# EAGLE board PocketPowerSource4.4 (EAGLE 6.4)
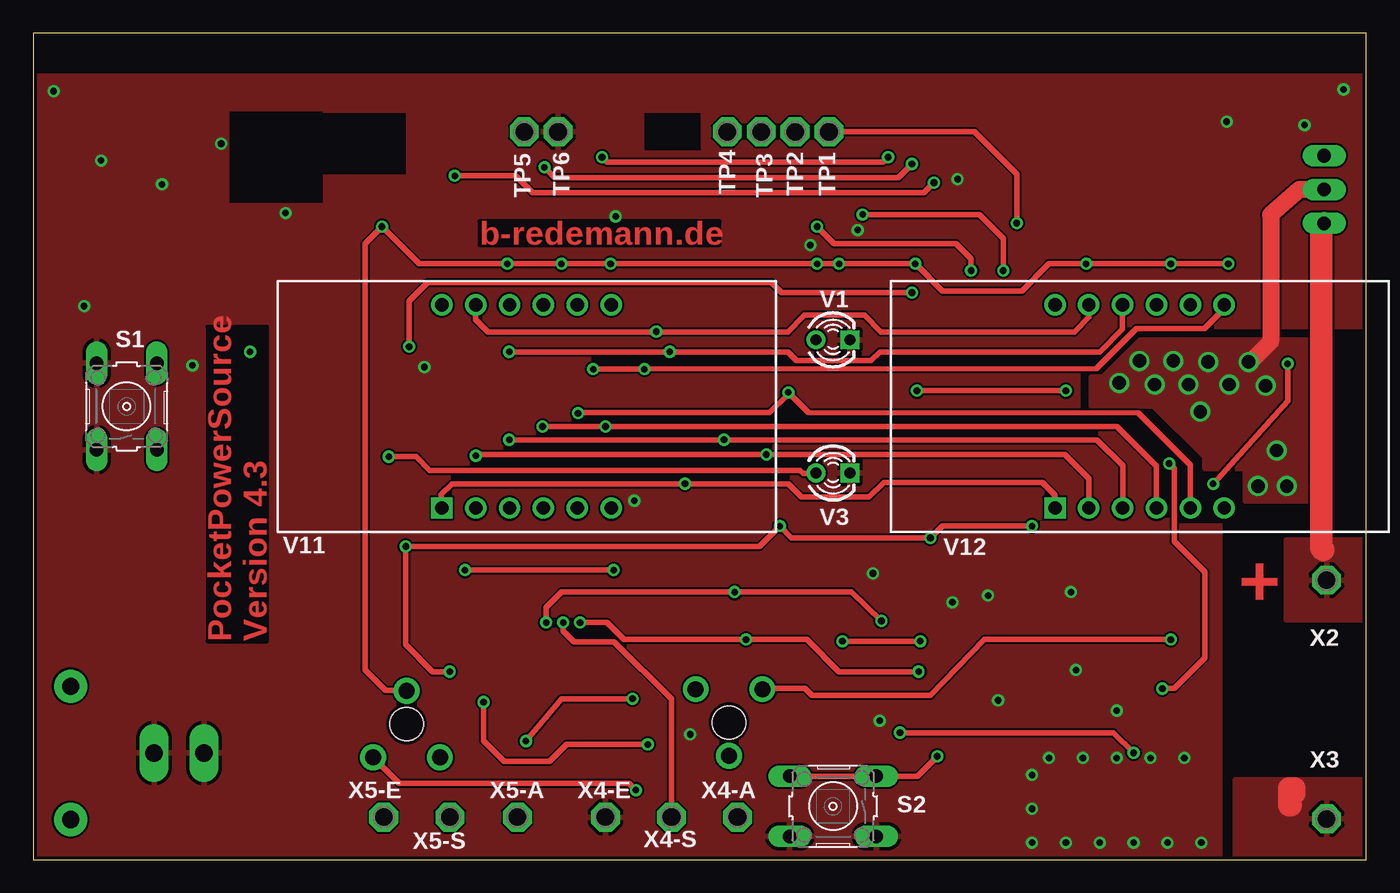
[diagram p0: board, top side]
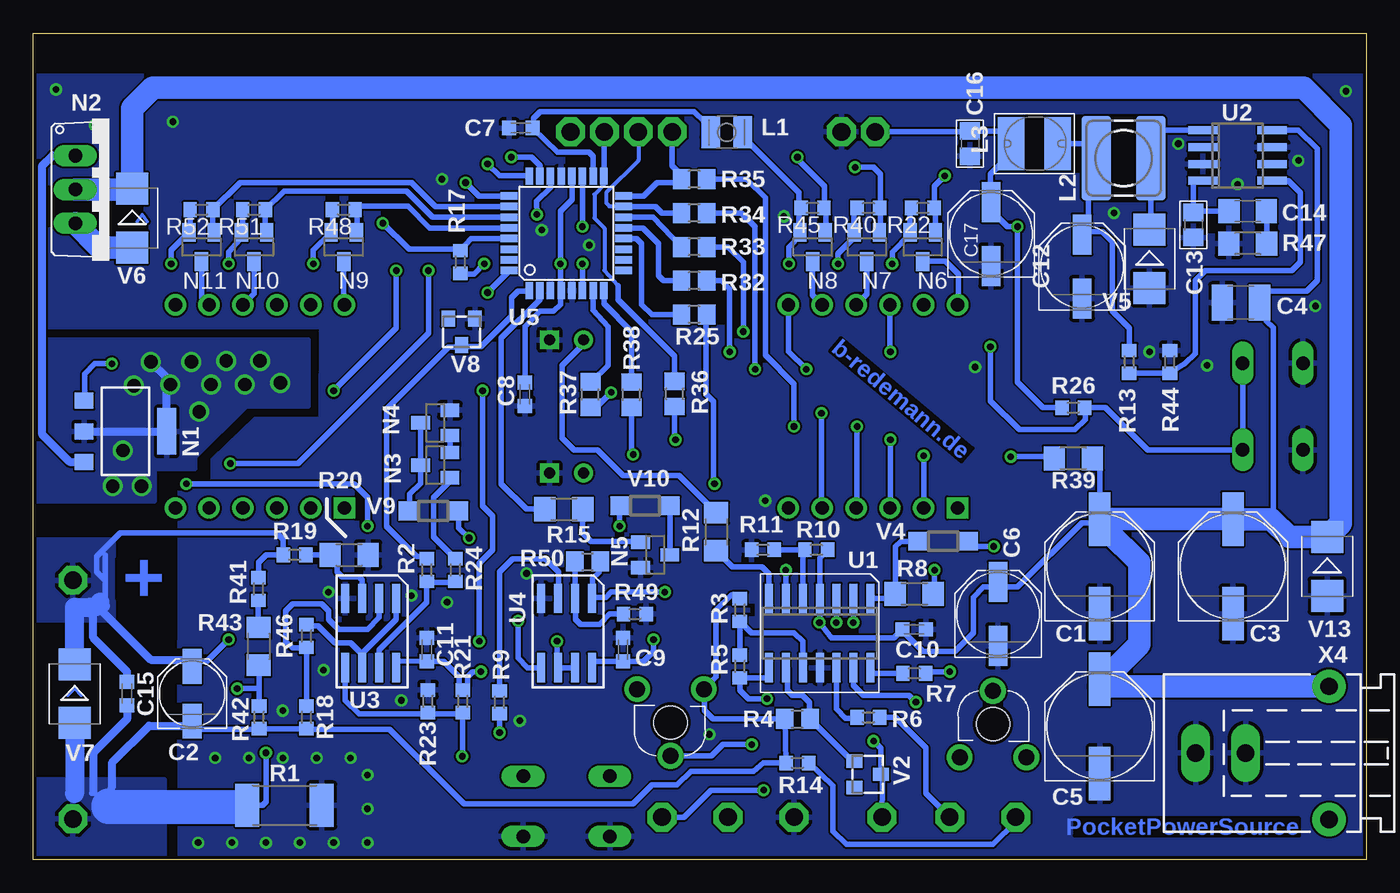
[diagram p1: board, bottom side, seen from below]

Size 100 x 62 mm. Coordinates in mm from the lower left corner, seen from the top.
Outline: 0,0 100,0 100,62 0,62 0,0
Copper layers (1*16): Top 0.035mm / dielectric 1.5mm / Bottom 0.035mm
Design rules "DFRobot_Eagle_Rule_v0.4": minimum track width 6mil, minimum drill 12mil, track to track 6mil, track to pad 6mil, pad to pad 6mil, via to via 6mil, smd to smd 0mil, copper to edge 10mil, drill to drill 10mil, minimum pad ring 12mil, minimum via ring 8mil, stop-mask expansion 2mil, vias tented up to drill 25mil, thermal gap 10mil
tKeepout: area 0,59 to 99.9,62
bKeepout: area 0,59 to 99.9,62
tRestrict: area 0,59 to 100.2,62; area 14.7,49.3 to 21.7,56.1; area 21.7,51.4 to 27.9,56; area 45.8,53.2 to 50,56; area 86,25.3 to 89.2,25.4
bRestrict: area 0,59 to 100.2,62; area 17.3,49.3 to 19.1,55.9; area 61,41.5 to 61.5,42.1; area 6.7,53.8 to 7.5,54.2; area 6.5,52.6 to 7.5,53.2; area 48.1,40.1 to 48.6,42.4; area 58.8,52.1 to 60.1,52.7; area 60.7,42.4 to 60.9,43.1; area 61.5,42.5 to 61.6,42.9; area 60,50.9 to 60.1,51.6; area 60.7,50.9 to 60.8,51.6; area 45.9,18.3 to 46.2,19.2; 6 more areas

## Footprints (pad centres in the part's own frame; a part is rotated, then mirrored left to right if it is on the bottom)
PANASONIC_F = smd 4 x 1.6: + 3.55,0; - -3.55,0
PANASONIC_C = smd 2.6 x 1.4: + 2.05,0; - -2.05,0
C1210 = smd 1.6 x 2.7: 1 -1.4,0; 2 1.4,0
PANASONIC_D = smd 3 x 1.4: + 2.4,0; - -2.4,0
C0603K = smd 1.05 x 1.08: 1 -0.875,0; 2 0.875,0
C0805 = smd 1.3 x 1.5: 1 -0.95,0; 2 0.95,0
C1206 = smd 1.6 x 1.8: 1 -1.4,0; 2 1.4,0
L2825P = smd 1.4 x 2.4: 1 -1.2,0; 2 1.2,0
POWER-CHOKE_WE-TPC = smd 6.3 x 2.2: 1 0,2.05; 2 0,-2.05
L4540 = smd 2 x 4: P$1 -1.75,0; P$2 1.75,0
PG-SOT-223 = smd 1.2 x 1.4: 1 -2.311,-3.099; 2 0,-3.099; 3 2.311,-3.099 | smd 3.5 x 1.4: 4 0,3.099
TO220AV = drill 1.016 long: B -2.54,-2.54; C 0,-2.54; E 2.54,-2.54
SOT23 = smd 1 x 1.4: 1 -0.95,-1.1; 2 0.95,-1.1; 3 0,1.1
PT6 = drill 1.2 pad 1.93: LEFT -2.5,-2.5; RIGHT 2.5,-2.5; WIPER 0,2.5 | hole 2.5: 0,0
R2512 = smd 1.8 x 3.2: 1 -2.8,0; 2 2.8,0
R0603 = smd 1 x 1.1: 1 -0.85,0; 2 0.85,0
R0805 = smd 1.3 x 1.5: 1 -0.95,0; 2 0.95,0
R1206 = smd 1.6 x 1.803: 1 -1.422,0; 2 1.422,0
B3F-10XX = drill 1.016 long: 1 -3.251,2.261; 2 3.251,2.261; 3 -3.251,-2.261; 4 3.251,-2.261
P1-13 = drill 1.321 pad 2.159 octagon: TP 0,0
SO14 = smd 0.6 x 2.2: 1 -3.81,-2.6; 2 -2.54,-2.6; 3 -1.27,-2.6; 4 0,-2.6; 5 1.27,-2.6; 6 2.54,-2.6; 7 3.81,-2.6; 8 3.81,2.6; 9 2.54,2.6; 10 1.27,2.6; 11 0,2.6; 12 -1.27,2.6; 13 -2.54,2.6; 14 -3.81,2.6
SO08 = smd 0.6 x 2.2: 1 -1.905,-2.6; 2 -0.635,-2.6; 3 0.635,-2.6; 4 1.905,-2.6; 5 1.905,2.6; 6 0.635,2.6; 7 -0.635,2.6; 8 -1.905,2.6
TQFP32-08 = smd 1.27 x 0.559: 1 -4.293,2.8; 2 -4.293,2; 3 -4.293,1.2; 4 -4.293,0.4; 5 -4.293,-0.4; 6 -4.293,-1.2; 7 -4.293,-2; 8 -4.293,-2.8; 17 4.293,-2.8; 18 4.293,-2; 19 4.293,-1.2; 20 4.293,-0.4; 21 4.293,0.4; 22 4.293,1.2; 23 4.293,2; 24 4.293,2.8 | smd 0.559 x 1.27: 9 -2.8,-4.293; 10 -2,-4.293; 11 -1.2,-4.293; 12 -0.4,-4.293; 13 0.4,-4.293; 14 1.2,-4.293; 15 2,-4.293; 16 2.8,-4.293; 25 2.8,4.293; 26 2,4.293; 27 1.2,4.293; 28 0.4,4.293; 29 -0.4,4.293; 30 -1.2,4.293; 31 -2,4.293; 32 -2.8,4.293
LED3MM = drill 0.813 pad 1.422: A -1.27,0 | drill 0.813 pad 1.422 square: K 1.27,0
TO236 = smd 1 x 1.2: A -1,-1; C 0,1; NC 1,-1
SOD123 = smd 1.4 x 1.4: A 1.9,0; C -1.9,0
SMB = smd 2.4 x 2.4: A 2.2,0; C -2.2,0
BX56-12 = drill 1 pad 1.6 square: 1 -6.35,-7.62 | drill 1 pad 1.6: 2 -3.81,-7.62; 3 -1.27,-7.62; 4 1.27,-7.62; 5 3.81,-7.62; 6 6.35,-7.62; 7 6.35,7.62; 8 3.81,7.62; 9 1.27,7.62; 10 -1.27,7.62; 11 -3.81,7.62; 12 -6.35,7.62
737992-5 = drill 1.3 pad 2.184 long: + 0,10; K 0,6.25 | drill 1.3 pad 2.5: -1 5,0; -2 -5,0

## Placement (x,y rotation side)
C1  100µ/50V  [PANASONIC_F]  20,22 90 bottom
C2  22µ/35V  [PANASONIC_C]  88.08,12.44 90 bottom
C3  100µ/50V  [PANASONIC_F]  10,22 90 bottom
C4  10µ  [C1210]  9.4,41.78 180 bottom
C5  100µ/50V  [PANASONIC_F]  20,10 90 bottom
C6  10µ/50V  [PANASONIC_D]  27.62,18.44 90 bottom
C7  100n  [C0603K]  63.43,54.89 180 bottom
C8  100n  [C0603K]  63.12,34.92 270 bottom
C9  100n  [C0603K]  55.75,15.75 90 bottom
C10  100n  [C0603K]  33.91,17.27 0 bottom
C11  100n  [C0603K]  70.48,15.75 90 bottom
C12  220µ/6V3  [PANASONIC_D]  21.32,44.49 90 bottom
C13  22p  [C0805]  12.95,47.62 90 bottom
C14  22n  [C1206]  8.89,48.64 0 bottom
C15  100n  [C0603K]  92.96,12.44 270 bottom
C16  22p  [C0805]  29.72,53.72 90 bottom
C17  220µ/6V3  [PANASONIC_D]  28.14,46.95 90 bottom
L1  10µH  [L2825P]  47.98,54.57 180 bottom
L2  33µH  [POWER-CHOKE_WE-TPC]  18.19,52.63 270 bottom
L3  10µH  [L4540]  24.89,53.72 180 bottom
N1  BCP56-16  [PG-SOT-223]  93.09,32.13 270 bottom
N2  MJE3055  [TO220AV]  94.31,50.28 270 bottom
N3  BC847  [SOT23]  69.85,29.59 90 bottom
N4  BC847  [SOT23]  69.85,32.77 90 bottom
N5  BC847  [SOT23]  53.34,22.86 270 bottom
N6  BSS84  [SOT23]  33.27,45.97 180 bottom
N7  BSS84  [SOT23]  37.47,45.97 180 bottom
N8  BSS84  [SOT23]  41.53,45.97 180 bottom
N9  BSS84  [SOT23]  76.71,45.97 180 bottom
N10  BSS84  [SOT23]  83.44,45.97 180 bottom
N11  BSS84  [SOT23]  87.38,45.97 180 bottom
P3  2k5  [PT6]  52.2,10.29 180 bottom
P4  10k  [PT6]  28,10.16 0 bottom
R1  0,1R 2W 1%  [R2512]  81.15,4.06 0 bottom
R2  10k  [R0603]  70.48,21.72 270 bottom
R3  8k2  [R0603]  46.99,18.72 270 bottom
R4  2k2  [R0805]  42.67,10.54 0 bottom
R5  10k  [R0603]  46.99,14.48 90 bottom
R6  10k  [R0603]  37.34,10.67 180 bottom
R7  1k  [R0603]  33.91,13.97 180 bottom
R8  18k  [R1206]  33.91,19.94 180 bottom
R9  1k  [R0603]  65.02,11.81 90 bottom
R10  22k  [R0603]  41.25,23.24 0 bottom
R11  47k  [R0603]  45.26,23.24 0 bottom
R12  4k7  [R1206]  48.77,24.6 90 bottom
R13  5k6  [R0603]  17.78,37.34 90 bottom
R14  100R  [R0603]  42.67,7.24 180 bottom
R15  4k7  [R1206]  60.2,26.29 180 bottom
R17  10k  [R0603]  67.97,44.84 90 bottom
R18  1k  [R0603]  79.5,10.67 90 bottom
R19  10k  [R0603]  80.39,22.86 0 bottom
R20  4k7  [R1206]  76.31,22.86 180 bottom
R21  10k  [R0603]  67.78,11.87 90 bottom
R22  1k  [R0603]  33.27,48.9 180 bottom
R23  10k  [R0603]  70.39,11.87 270 bottom
R24  10k  [R0603]  68.33,21.72 90 bottom
R25  470R  [R0805]  50.42,40.89 180 bottom
R26  10k  [R0603]  21.97,33.91 180 bottom
R32  470R  [R0805]  50.42,43.43 180 bottom
R33  470R  [R0805]  50.42,45.97 180 bottom
R34  470R  [R0805]  50.42,48.51 180 bottom
R35  470R  [R0805]  50.42,51.05 180 bottom
R36  470R  [R0805]  51.88,34.94 90 bottom
R37  470R  [R0805]  58.21,34.89 90 bottom
R38  470R  [R0805]  55.13,34.88 90 bottom
R39  4k7  [R1206]  21.97,30.1 0 bottom
R40  1k  [R0603]  37.34,48.9 180 bottom
R41  22k  [R0603]  83.1,20.3 90 bottom
R42  3k3  [R0603]  83.06,10.67 270 bottom
R43  4k7  [R1206]  83.1,16 90 bottom
R44  3k3  [R0603]  14.73,37.34 270 bottom
R45  1k  [R0603]  41.53,48.9 180 bottom
R46  1M*  [R0603]  79.5,16.76 90 bottom
R47  4k7  [R1206]  8.89,46.23 0 bottom
R48  1k  [R0603]  76.71,48.77 180 bottom
R49  10k  [R0603]  54.86,18.41 180 bottom
R50  91k  [R0805]  58.42,22.35 0 bottom
R51  1k  [R0603]  83.44,48.77 180 bottom
R52  1k  [R0603]  87.38,48.77 180 bottom
S1  on/off  [B3F-10XX]  7,34 90 top
S2  Set-I  [B3F-10XX]  60,4 180 top
TP1  RESET  [P1-13]  59.69,54.61 0 top
TP2  SCK  [P1-13]  57.15,54.61 0 top
TP3  MOSI  [P1-13]  54.61,54.61 0 top
TP4  MISO  [P1-13]  52.07,54.61 0 top
TP5  +3V3  [P1-13]  36.83,54.61 0 top
TP6  GND  [P1-13]  39.37,54.61 0 top
U1  LM324D  [SO14]  41,17 180 bottom
U2  L5970D  [SO08]  9.65,52.83 270 bottom
U3  LM358D  [SO08]  74.7,17 180 bottom
U4  LM358D  [SO08]  60,17 180 bottom
U5  Atmega8A-AU  [TQFP32-08]  60,47 90 bottom
V1  CC / rot  [LED3MM]  60,39 0 top
V2  BZX84C5V1  [TO236]  37.4,6.4 270 bottom
V3  PWR / gn  [LED3MM]  60,29 0 top
V4  SS0540  [SOD123]  31.75,23.88 0 bottom
V5  SS24  [SMB]  16.26,45.09 270 bottom
V6  ES2D  [SMB]  92.58,48.13 270 bottom
V7  ES2D  [SMB]  96.9,12.44 270 bottom
V8  BZX84C3V3  [TO236]  67.87,39.6 180 bottom
V9  SS0540  [SOD123]  69.98,26.16 0 bottom
V10  SS0540  [SOD123]  54.1,26.54 180 bottom
V11  BA56-12EWA  [BX56-12]  37,34 0 top
V12  BA56-12EWA  [BX56-12]  83,34 0 top
V13  ES2D  [SMB]  2.92,22 270 bottom
X2  DC_OUT  [P1-13]  97.03,20.95 0 top
X3  GND_OUT  [P1-13]  97.03,3.05 0 top
X4  PWR  [737992-5]  2.8,8 90 bottom
X4-A  P_I-A  [P1-13]  52.83,3.17 90 top
X4-E  P_I-E  [P1-13]  42.93,3.17 90 top
X4-S  P_I-W  [P1-13]  47.88,3.17 90 top
X5-A  P_U-A  [P1-13]  36.32,3.17 90 top
X5-E  P_U-E  [P1-13]  26.29,3.17 0 top
X5-S  P_U-S  [P1-13]  31.24,3.17 0 top

## Library data of the parts
C1-C17 L2 L3 R1-R15 R17-R26 R32-R52 = rcl
L1 = resistor
N1 = infineon
N2 = transistor-power
N3-N5 = transistor-neu-to92
N6-N11 = transistor-small-signal
P3 P4 = piher
S1 S2 = switch-omron; MPN: B3F-1000; OC_FARNELL: 176432; OC_NEWARK: 36M3542
TP1-TP6 X2 X3 X4-A X4-E X4-S X5-A X5-E X5-S = testpad
U1 U3 U4 = linear; MF: STMicroelectronics
U2 = st-microelectronics; MF: STMicroelectronics
U5 = atmel; MPN: ATMEGA8-16AU; OC_FARNELL: 9171371; OC_NEWARK: 73M8863
V1 V3 = led
V2 V4 V5 V8-V10 = diode
V6 V7 V13 = diode; OC_REICHELT: ES 2D SMD
V11 V12 = display-kingbright; OC_FARNELL: unknown; OC_NEWARK: unknown
X4 = con-conrad

## Nets
+3V3: C8.1 C16.2 C17.+ L1.1 L3.P$2 N6.2 N7.2 N8.2 N9.2 N10.2 N11.2 P4.WIPER R17.1 R22.2 R26.2 R40.2 R45.2 R48.2 R51.2 R52.2 TP5.TP U5.4 U5.6 U5.20
A: R33.1 V11.11 V12.11
ADC6: R42.1 R43.1 U5.19
ADC7: U4.6 U4.7 U5.22
AVCC: C7.1 L1.2 U5.18
B: R34.1 V11.7 V12.7
C: R35.1 V11.4 V12.4
CTRL_ON_OFF: N5.3 V10.C
D: R38.1 V11.2 V12.2
DC_OUT: C2.+ C15.1 N2.E P3.RIGHT R19.1 R41.2 V6.A V7.C X2.TP
DP: R36.1 V11.3 V12.3
E: R25.1 V11.1 V12.1
F: R32.1 V11.10 V12.10
G: R37.1 V11.5 V12.5
GND: C1.- C3.- C4.2 C5.- C6.- C7.2 C8.2 C9.2 C10.2 C11.2 C12.- C13.1 C16.1 C17.- N4.2 N5.2 R1.2 R11.1 R20.1 R23.1 R44.1 R47.1 R49.1 S1.1 S1.2 S2.1 S2.2 TP6.TP U1.11 U2.3 U2.7 U3.4 U4.4 U5.3 U5.5 U5.21 V1.K V3.K V5.A V8.A V13.A X4-E.TP X4.+ X4.K
GND_OUT: C2.- C15.2 P3.LEFT R1.1 R3.1 R4.1 R9.1 R14.2 R18.1 R42.2 V7.A X3.TP
MISO: R35.2 TP4.TP U5.16
MOSI: R34.2 TP3.TP U5.15
N$1: R19.2 R20.2 U3.3
N$2: R8.1 U1.6
N$3: R5.1 U1.8 V2.C X5-A.TP
N$4: R12.1 U1.7
N$5: R9.2 U4.3
N$6: P4.RIGHT X4-A.TP
N$7: R12.2 V1.A
N$8: R8.2 U1.1 V4.C
N$9: N3.1 R24.2
N$10: R3.2 R5.2 U1.10
N$11: R4.2 U1.9 V2.A
N$12: N1.3 N2.B
N$13: R2.2 R24.1 U3.7
N$14: R7.2 U1.14
N$15: R41.1 R43.2
N$17: C13.2 C14.1 U2.4
N$18: R10.1 R11.2 U1.5
N$19: R6.2 U1.12
N$20: P3.WIPER U1.13
N$21: R6.1 X5-S.TP
N$22: N5.1 R15.1
N$23: R14.1 X5-E.TP
N$24: U1.3 X4-S.TP
N$25: C12.+ L2.2 L3.P$1 R13.2
N$27: R18.2 R46.1 U3.2
N$28: R46.2 U3.1 U3.6
N$29: R21.1 R23.2 S2.3 S2.4 U3.5
N$30: R49.2 R50.1 U4.2
N$31: N3.2 N4.1
N$34: N3.3 N4.3 V9.C
N$35: R39.1 V3.A
N$36: R25.2 U5.12
N$37: R32.2 U5.13
N$45: N7.3 V11.9
N$46: N10.3 V12.9
N$47: N8.3 V11.8
N$48: N6.3 V11.12
N$49: N9.3 V12.12
N$50: N11.3 V12.8
N$53: R33.2 U5.14
N$57: R37.2 U5.7
N$58: R38.2 U5.8
N$59: R13.1 R44.2 U2.5
N$60: C14.2 R47.2
N$61: L2.1 U2.1 V5.C
ON/OFF: R26.1 S1.3 S1.4 U5.32
ON_OFF: N1.1 R7.1 V4.A V9.A V10.A
ON_OFF_T: R15.2 U5.2
PC0: N8.1 R45.1 U5.23
PC1: N7.1 R40.1 U5.24
PC2: N6.1 R22.1 U5.25
PC3: N11.1 R52.1 U5.26
PC4: N10.1 R51.1 U5.27
PC5: N9.1 R48.1 U5.28
RESET: R17.2 TP1.TP U5.29
SCK: R36.2 TP2.TP U5.17
SHT_DTCT: R2.1 U5.1 V8.C
VDC_IN: C1.+ C3.+ C4.1 C5.+ C6.+ C9.1 C10.1 C11.1 N1.2 N1.4 N2.C R10.2 R21.2 R39.2 U1.4 U2.8 U3.8 U4.8 V6.C V13.C X4.-1
X6-OPAMP: R50.2 U1.2 U4.1 U4.5

## Tracks (layer width: path | path; a pad name or v marks a point on that pad's centre or on a via)
+3V3  (via drill 0.5)
  Top 0.406: v89.66,44.7 v85.34,44.7 v78.99,44.7 78.99,44.58 78.87,44.7 76.2,44.7 74.17,42.67 68.2,42.67 v66.17,44.7 v60.45,44.7 v58.8,44.7 v43.31,44.7 v39.62,44.7 v35.56,44.7 28.96,44.7 v26.16,47.5 24.89,46.23 24.89,14.22 26.42,12.7 27.96,12.7 P4.WIPER
  Bottom 0.406: 42.55,49.06 42.55,47.14 N8.2 42.48,46.8 43.31,45.97 v43.31,44.7 | v39.62,44.7 39.62,45.47 38.41,46.67 N7.2 38.41,48.67 R40.2 | v78.99,44.7 78.99,45.72 77.66,47.06 N9.2 77.56,47.17 R48.2 | v85.34,44.7 85.34,45.59 84.26,46.8 84.39,46.93 N10.2 84.29,47.17 R51.2 | v89.66,44.7 89.66,45.72 88.33,47.06 N11.2 88.3,47.1 88.23,47.1 R52.2 | 60.4,44.65 v60.45,44.7 | 58.8,44.58 v58.8,44.7 U5.6 | U5.20 59.56,51.26 59.56,49.53 60.45,48.64 v60.45,44.7 | v60.45,44.7 60.45,42.76 U5.4 60.45,42.63 60.45,41.66 60.96,41.15 61.98,41.15 63.12,40.01 C8.1 | 46.61,54.48 46.69,54.48 L1.1 46.86,54.48 46.86,53.85 46.7,53.68 46.19,53.68 42.55,50.04 42.55,49.06 | L3.P$2 26.1,53.72 | TP5.TP 29.59,54.61 C16.2 26.64,54.67 L3.P$2 | v26.16,47.5 26.15,47.5 | L3.P$2 26.09,52.83 26.8,52.83 28.19,51.44 28.19,49.4 C17.+ 28.14,48.72 26.92,47.5 v26.16,47.5 | v66.17,44.7 66.93,43.94 67.93,43.94 R17.1 | R26.2 24.26,33.91 26.16,35.81 v26.16,47.5 | v35.56,44.7 35.56,45.59 34.22,46.93 N6.2 34.22,48.8 R22.2 | 42.55,49.06 R45.2
A  (via drill 0.5)
  Top 0.406: V11.11 33.19,40.51 34.1,39.6 46.63,39.6 | V12.11 79.2,40.7 78.1,39.6 63.6,39.6 62.35,40.85 57.85,40.85 56.6,39.6 46.63,39.6 | 46.63,39.6 v46.74,39.62
  Bottom 0.406: R33.1 47.88,45.97 46.74,44.83 v46.74,39.62
ADC6  (via drill 0.5)
  Top 0.406: v70.36,44.2 70.36,45.09 69.22,46.23 60.07,46.23 v58.8,47.5 | v85.22,29.72 85.6,29.34 85.6,23.88 87.88,21.59 87.88,15.11 85.6,12.83 v84.71,12.83
  Bottom 0.406: 83.06,12.83 R42.1 | v70.36,44.2 70.36,39.5 80.14,29.72 v85.22,29.72 | v58.8,47.5 U5.19 | v84.71,12.83 83.06,12.83 | 83.06,12.83 83.06,14.56 R43.1
ADC7  (via drill 0.5)
  Top 0.406: v62.22,48.4 70.98,48.4 72.77,46.61 v72.77,44.2 | v77.47,35.18 v66.29,35.18 | v60.71,16.38 v66.55,16.38
  Bottom 0.406: U5.22 61.2,50.43 62.23,49.4 v62.22,48.4 | v72.77,44.2 72.77,39.88 v77.47,35.18 | v66.55,16.38 66.55,22.23 65.53,23.24 65.53,25.78 66.29,26.54 v66.29,35.18 | U4.7 U4.6 60.71,14.4 v60.71,16.38
AVCC
  Bottom 0.406: U5.18 58,52.79 58.29,53.09 60.67,53.09 C7.1 62.48,54.9 62.48,55.63 61.98,56.13 50.42,56.13 49.66,55.37 49.66,54.23 49.68,54.2 L1.2
B  (via drill 0.5)
  Top 0.406: v42,36.8 v45.85,36.8 79.76,36.83 82.77,39.85 87.87,39.85 89.37,41.35 89.5,41.47 V12.7
  Bottom 0.406: V11.7 43.35,38.12 v42,36.8 | R34.1 46.86,48.51 45.85,47.5 v45.85,36.8
C  (via drill 0.5)
  Top 0.406: V12.4 84.27,29.53 81.3,32.5 v42.93,32.5 v38.2,32.5
  Bottom 0.406: v38.2,32.5 38.2,26.51 V11.4 | R35.1 46.48,51.05 45.09,49.66 45.09,37.85 42.93,35.69 v42.93,32.5
CTRL_ON_OFF
  Bottom 0.406: V10.C 52.24,26.5 N5.3
D  (via drill 0.5)
  Top 0.406: V12.2 79.19,28.61 77.4,30.4 v54.99,30.4 33.3,30.4 v33.2,30.3 33.27,30.37
  Bottom 0.406: v33.2,30.3 V11.2 | R38.1 55.13,30.54 v54.99,30.4
DC_OUT  (via drill 0.5)
  Top 0.406: v85.34,16.51 71.37,16.51 67.31,12.32 58.42,12.32 57.91,12.83 54.74,12.83 P3.RIGHT
  Top 1.676: 96.77,23.24 96.65,23.37 96.65,47.53 N2.E
  Bottom 0.406: 95.5,18.67 95.76,18.92 | 94.74,19.05 94.74,18.92 | 94.74,18.92 94.74,18.54 | C2.+ 88.23,14.99 88.11,14.86 87,14.86 v85.34,16.51 | 94.61,22.86 94.61,20.95 | 94.61,20.95 94.61,19.05 94.74,18.92 | 94.61,20.95 95.25,21.59 95.25,22.73 93.47,24.51 81.75,24.51 81.24,24 R19.1 82.54,22.86 83.1,22.3 R41.2
  Bottom 0.61: C15.1 92.96,14.1 95.5,16.64 95.5,18.67 | 94.74,18.54 91.19,14.99 88.23,14.99
  Bottom 1.016: 94.74,19.05 95,19.3
  Bottom 1.422: V7.C 96.9,18.92 95.76,18.92 95.38,18.92 95,19.3
  Bottom 1.676: V6.A 95.05,45.93 N2.E
  pour Top: 100,24 94,24 94,18 100,18
  pour Bottom: 100,24 94,24 94,18 100,18
DP  (via drill 0.5)
  Top 0.406: V12.3 81.73,29.57 79.8,31.5 v51.82,31.5 v35.7,31.5
  Bottom 0.406: v35.7,31.5 35.7,26.55 V11.3 | 51.94,34.04 51.88,33.98 R36.1 51.88,31.56 v51.82,31.5
E  (via drill 0.5)
  Top 0.406: V12.1 76.65,27.35 75.7,28.3 63.81,28.3 62.7,27.19 57.65,27.19 56.64,28.2 v48.9,28.2 31.4,28.2 30.6,27.4 30.6,26.43 V11.1
  Bottom 0.406: v48.9,28.2 48.9,28.32 48.96,28.25 48.96,34.36 49.53,34.92 49.53,40.83 R25.1
F  (via drill 0.5)
  Top 0.406: v35.7,38.1 v47.75,38.1 56.6,38.1 57.25,37.45 62.85,37.45 63.5,38.1 80,38.1 81.7,39.8 81.7,41.59 V12.10
  Bottom 0.406: V11.10 35.73,38.17 v35.7,38.1 | R32.1 48.39,43.43 47.75,42.8 v47.75,38.1
G  (via drill 0.5)
  Top 0.406: V12.5 86.81,29.59 82.9,33.5 58.17,33.53 56.8,34.9 56.77,34.9 | 56.77,34.9 56.61,34.9 55.24,33.53 40.87,33.53 v40.87,33.5 40.9,33.6 | v56.64,35.05 56.77,34.9
  Bottom 0.406: v40.87,33.5 40.87,26.57 V11.5 | R37.1 57.99,33.91 57.78,33.91 v56.64,35.05
GND  (via drill 0.5)
  other vias: 29.34,36.96 81.28,11.18 78.23,14.22 87.63,1.27 45.09,26.92 43.69,48.26 72.39,11.94 98.3,57.78 95.38,55.12 89.53,55.37 69.34,51.05 77.85,20.07 1.52,57.66 61.85,47.24 58.29,46.1 68.96,19.3 63.5,10.41 49.28,9.4 62.99,21.46 9.65,50.67 11.94,37.08 16.26,38.1 14.1,53.72 18.92,48.51 5.08,52.45 85.09,1.27 82.55,1.27 80.01,1.27 77.47,1.27 74.93,1.27 74.93,3.81 74.93,6.35 76.2,7.62 78.74,7.62 81.28,7.62 83.82,7.62 86.36,7.62 71.63,19.81 3.81,41.53
  pour Bottom: 0,62 99.97,62 100,40 78.38,40 78.4,33.02 83.32,33.05 86.51,30 86.51,28.13 89,28 88.98,25.11 89.03,7.87 88.98,6.86 88.98,0 0,0
  pour Top: 0,62 0,0 89,0 89,28 86.51,28 86.51,30 83.3,33.05 78.38,33.14 78.36,36.7 81.66,40 99.89,40 100,40.11 100,62
GND_OUT  (via drill 0.5)
  Top 0.406: v65.02,9.53 81.03,9.53 v82.55,8
  Top 1.676: 94.36,4.06 94.23,4.06 94.23,4.95 | 94.23,4.95 94.61,4.95 94.61,5.33 94.23,5.33 94.23,4.95
  Bottom 0.406: R18.1 R42.2 83.12,9.78 87.83,9.78 C2.- | R3.1 47.62,19.87 48.77,18.73 48.77,13.72 P3.LEFT 49.66,12.75 49.66,11.18 49.02,10.54 R4.1 R14.2 45.21,7.24 45.97,6.6 50.67,6.6 51.69,5.59 53.59,5.59 54.99,4.19 67.69,4.19 73.28,9.78 79.46,9.78 R18.1 | 95.5,5.08 95.63,4.95 | 94.11,5.46 94.23,5.33 | 79.38,9.72 R18.1 | R9.1 v65.02,9.53 | v82.55,8 82.55,4.32 82.8,4.06 R1.1
  Bottom 0.61: C15.2 92.96,10.54 95.5,8 95.5,5.08 | 94.11,5.46 94.11,7.24 91.31,10.04 88.43,10.04 C2.-
  Bottom 1.422: V7.A 96.9,4.95 | R1.1 84.33,4.06 84.33,3.94
  Bottom 2.54: 84.33,3.94 94.36,3.94 94.36,4.06
  pour Top: 100,0 90.19,0 90.19,6 100,6
  pour Bottom: 100,0 90.19,0 90.19,6 100,6
MISO
  Bottom 0.305: 51.62,50.8 R35.2
  Bottom 0.406: R35.2 51.37,51.37 52.07,52.07 TP4.TP | U5.16 54.21,49.8 53.21,50.8 51.62,50.8
MOSI
  Bottom 0.305: TP3.TP 54.61,52.45 57.02,50.04 57.02,49.28 56.77,49.02 55.73,49.02
  Bottom 0.406: 51.56,48.51 R34.2 52.83,48.51 53.32,49 U5.15 55.73,49.02
N$1
  Bottom 0.406: R19.2 R20.2 77.22,22.82 77.22,21.59 76.83,21.21 75.56,21.21 75.33,20.98 U3.3
N$2  (via drill 0.5)
  Top 0.406: v43.55,21.72 v32.38,21.72
  Bottom 0.406: v32.38,21.72 32.38,20.07 R8.1 | U1.6 v43.54,21.71 v43.55,21.72
N$3  (via drill 0.5)
  Top 0.406: v36.96,8.89 39.62,12.06 v44.96,12.06
  Bottom 0.406: U1.8 44.83,14.38 44.83,13.59 44.87,13.63 R5.1 46.99,12.7 46.35,12.06 v44.96,12.06 | X5-A.TP 36.3,5.7 36.3,6.4 V2.C 36.4,8.33 v36.96,8.89
N$4
  Bottom 0.406: U1.7 44.81,21.44 45.34,21.97 47.54,21.97 R12.1
N$5
  Bottom 0.406: U4.3 60.58,19.66 60.58,21.59 61.56,22.57 64.05,22.57 65.02,21.59 R9.2
N$6  (via drill 0.5)
  Top 0.406: v45.21,5.21 44.7,5.71 27.45,5.71 P4.RIGHT
  Bottom 0.406: v45.21,5.21 49.15,5.21 51.18,3.17 X4-A.TP
N$7
  Bottom 0.406: V1.A 58.73,38.68 60.33,37.08 60.33,31.62 59.44,30.73 57.66,30.73 55.75,28.83 51.56,28.83 48.77,26.04 R12.2
N$8
  Bottom 0.406: U1.1 35.67,19.6 R8.2 35.31,19.96 35.31,23.5 34.92,23.88 V4.C
N$9
  Bottom 0.406: N3.1 68.75,28.41 69.98,27.18 69.98,24.22 R24.2
N$10
  Bottom 0.406: U1.10 42.27,16.36 42.93,17.02 46.13,17.02 R3.2 R5.2
N$11
  Bottom 0.406: U1.9 43.43,14.29 43.43,12.7 43.05,12.32 42.29,12.32 41.78,11.81 41.78,10.6 R4.2 38.91,7.73 V2.A
N$12
  Bottom 0.61: N1.3 96.22,29.84 97.28,29.84 99.31,31.88 99.31,52.07 98.55,52.83 96.87,52.83 N2.B
N$13
  Bottom 0.406: U3.7 74.06,15.73 70.48,19.3 R2.2 70.16,20.8 68.65,20.8 R24.1
N$14
  Bottom 0.406: R7.2 37.19,13.97 U1.14
N$15
  Bottom 0.406: R43.2 83.12,17.91 83.12,19.42 R41.1
N$17
  Bottom 0.406: C14.1 12.95,48.64 C13.2 12.95,50.93 U2.4
N$18
  Bottom 0.406: R11.2 R10.1 42.27,23.07 U1.5
N$19
  Bottom 0.406: R6.2 38.35,10.61 39.05,10.61 39.75,11.3 39.75,14.38 U1.12
N$20  (via drill 0.5)
  Top 0.406: v46.1,8.64 40.01,8.64 38.73,7.37 35.31,7.37 33.78,8.89 v33.78,11.81
  Bottom 0.406: v33.78,11.81 34.29,12.32 37.72,12.32 38.46,13.06 U1.13 | P3.WIPER 49.11,7.79 48.26,8.64 v46.1,8.64
N$21
  Bottom 0.406: R6.1 35.31,10.67 33.02,8.38 33.02,4.95 X5-S.TP
N$22
  Bottom 0.406: N5.1 54.88,23.88 58.17,23.88 58.8,24.51 58.8,26.26 R15.1
N$23
  Bottom 0.406: R14.1 40,5.52 40,2.13 39,1.13 28,1.13 26.28,2.85 X5-E.TP 26.28,3.18
N$24  (via drill 0.5)
  Top 0.406: v39.75,17.78 39.75,17.14 40.56,16.33 43.59,16.33 47.87,12.05 47.87,3.18 X4-S.TP
  Bottom 0.406: U1.3 39.73,17.8 v39.75,17.78
N$25
  Bottom 0.406: L3.P$1 20.24,53.72 L2.2 20.24,52.58 20.83,52.58 20.83,47.09 C12.+ 20.8,47.12 19.81,47.12 19.05,46.35 19.05,41.15 17.78,39.88 R13.2
N$27
  Bottom 0.406: U3.2 74.04,19.37 74.04,18.16 74.93,17.27 77.09,17.27 77.85,18.03 77.85,18.67 78.36,19.18 80.55,19.18 81.05,18.67 81.05,16.38 80.55,15.88 79.56,15.88 R46.1 | 79.44,15.88 R46.1 | R18.2 R46.1
N$28
  Bottom 0.406: U3.6 75.33,15.39 | U3.1 72.77,19.32 72.77,18.03 75.33,15.47 75.33,15.39 | 75.33,15.39 76.2,16.26 77.34,16.26 78.61,17.53 79.38,17.53 R46.2
N$29  (via drill 0.5)
  Top 0.406: S2.4 S2.3 66.33,6.26 v67.82,7.75
  Bottom 0.406: U3.5 76.6,11.96 75.56,10.92 70.39,10.92 | 70.39,10.92 R23.2 | 70.39,10.92 67.79,10.92 | 67.79,10.92 R21.1 | 67.79,10.92 67.79,7.78 v67.82,7.75
N$30
  Bottom 0.406: R50.1 U4.2 59.31,19.54 59.31,18.03 58.93,17.65 57.53,17.65 56.77,18.41 R49.2
N$31
  Bottom 0.406: N4.1 N3.2
N$32
  Bottom 0.254: 91.44,47.88 91.82,48.39 92.2,47.88
N$33
  Bottom 0.254: 96.39,12.32 96.9,12.83 97.41,12.32
N$34
  Bottom 0.406: N4.3 N3.3 70.95,28.24 71.75,27.43 71.75,26.28 V9.C
N$35  (via drill 0.5)
  Top 0.406: V3.A 58.69,28.96 57.78,28.96 57.53,29.21 29.72,29.21 28.7,30.23 v26.67,30.23
  Bottom 0.406: v26.67,30.23 23.05,30.23 R39.1
N$36
  Bottom 0.406: U5.12 54.73,46.6 54.36,46.23 54.36,41.66 53.59,40.89 R25.2
N$37
  Bottom 0.406: U5.13 54.26,47.4 53.09,46.23 53.09,43.81 52.7,43.43 R32.2
N$45
  Bottom 0.406: V11.9 37.47,42.42 N7.3
N$46
  Bottom 0.406: V12.9 83.44,42.45 N10.3
N$47
  Bottom 0.406: V11.8 41.53,42.34 N8.3
N$48
  Bottom 0.406: V11.12 30.61,41.66 30.61,43.94 31.57,44.9 33.25,44.9 N6.3
N$49
  Bottom 0.406: V12.12 76.71,41.68 N9.3
N$50
  Bottom 0.406: V12.8 87.38,42.19 N11.3
N$53
  Bottom 0.406: U5.14 53.49,48.2 R33.2 51.31,45.97
N$57
  Bottom 0.406: U5.7 58,41.24 56.9,40.01 56.9,37.08 58.17,35.81 58.17,35.89 R37.2
N$58
  Bottom 0.406: U5.8 57.2,41.71 55.12,39.62 55.12,35.85 R38.2
N$59
  Bottom 0.406: U2.5 5.84,50.93 4.95,50.04 4.95,44.83 5.59,44.2 12.06,44.2 12.83,43.43 12.83,37.97 13.59,37.21 14.64,36.58 R44.2 | 14.93,36.58 R44.2 | 17.91,36.62 R13.1 R44.2
N$60
  Bottom 0.406: C14.2 7.47,48.64 R47.2
N$61
  Bottom 0.406: U2.1 16.14,54.74 | 16.26,54.74 16.14,54.74 | 16.14,54.74 L2.1 16.14,47.28 V5.C
ON/OFF  (via drill 0.5)
  Top 0.406: v65.91,42.55 56.13,42.55 55.37,43.31 29.59,43.31 28.19,41.91 v28.19,38.48
  Bottom 0.406: U5.32 64.29,44.16 v65.91,42.55 | v28.19,38.48 28.19,34.42 26.04,32.26 21.84,32.26 21.08,33.02 21.08,33.85 R26.1 | 20.95,33.84 R26.1 | S1.4 S1.3 9.28,30.73 16.38,30.73 19.56,33.91 R26.1
ON_OFF  (via drill 0.5)
  Top 0.406: v31.24,14.1 29.97,14.1 27.94,16.13 v27.94,23.5 54.48,23.5 v56.01,25.02 56.9,24.13 v67.31,24.13 68.2,25.02 v74.93,25.02 | v94.11,37.21 94.11,34.42 v88.52,28.19
  Bottom 0.406: v88.52,28.19 75.95,28.19 74.93,27.18 v74.93,25.02 | v94.11,37.21 95.38,37.21 96.14,36.45 96.14,34.49 N1.1 | V4.A 29.85,23.75 29.59,23.5 v27.94,23.5 | V9.A 68.08,24.9 v67.31,24.13 | v31.24,14.1 33.06,14.1 R7.1 | v56.01,25.02 V10.A
ON_OFF_T
  Bottom 0.406: U5.2 62,42.01 64.9,39.12 64.9,28.19 62.99,26.29 R15.2
PC0  (via drill 0.5)
  Top 0.406: v64.14,52.7 63.75,52.32 43.05,52.32 42.67,52.7 v42.66,52.7
  Bottom 0.406: v64.14,52.7 62.61,52.7 61.98,52.07 61.98,51.32 U5.23 | v42.66,52.7 42.66,52.57 40.64,50.55 40.64,48.93 R45.1 40.51,48.73 40.51,47.17 40.58,47.1 N8.1
PC1  (via drill 0.5)
  Top 0.406: v38.35,51.94 v38.35,51.95 39.12,51.18 64.9,51.18 v65.91,52.2
  Bottom 0.406: v65.91,52.2 65.02,51.31 62.81,51.31 U5.24 | v38.35,51.94 36.93,51.94 36.93,51.91 36.45,51.44 36.45,48.93 R40.1 36.45,48.86 36.45,47.14 N7.1
PC2  (via drill 0.5)
  Top 0.406: v31.62,51.31 36.2,51.31 37.47,50.04 66.8,50.04 v67.56,50.8
  Bottom 0.406: U5.25 64.31,49.78 66.55,49.78 v67.56,50.8 | v31.62,51.31 32.38,50.55 32.38,48.93 R22.1 32.32,48.8 N6.1
PC3
  Bottom 0.406: U5.26 69.83,49 71.63,50.8 84.49,50.8 R52.1 | 86.36,47.17 86.53,47.17 | 86.53,47.17 R52.1 | 86.36,48.93 R52.1 | N11.1 86.53,47.17
PC4
  Bottom 0.406: U5.27 70.04,48.2 72.01,50.16 81.19,50.16 R51.1 | 82.42,48.93 R51.1 | R51.1 82.59,47.17 N10.1
PC5
  Bottom 0.406: U5.28 70.26,47.4 71.88,49.02 75.73,49.02 R48.1 75.69,48.6 75.69,47.14 N9.1
RESET  (via drill 0.5)
  Top 0.406: TP1.TP 70.61,54.61 73.79,51.44 v73.79,47.75
  Bottom 0.406: U5.29 67.16,46.6 R17.2 68.08,45.79 71.82,45.79 v73.79,47.75
SCK
  Bottom 0.305: 56.13,43.05 57.15,44.2 57.15,47.37 57.91,48.13 57.91,49.91 57.15,50.67 57.15,51.24
  Bottom 0.406: R36.2 51.88,37.78 56.13,42.04 56.13,43.05 | 57.15,51.24 U5.17 57.2,54.56 TP2.TP
SHT_DTCT
  Bottom 0.406: R2.1 70.23,22.73 71.25,22.73 73.5,24.99 73.5,33.81 68.84,38.47 67.99,38.47 67.99,38.59 V8.C 67.9,38.5 66.4,38.5 64.14,40.77 64.14,42.16 63.63,42.67 62.84,42.67 U5.1
VDC_IN  (via drill 0.5, 1)
  Top 0.406: v66.42,14.1 60.45,14.1 58.04,16.51 v53.47,16.51 44.32,16.51 43.05,17.78 v41.02,17.78
  Top 0.61: 91.31,37.34 v91.19,37.34
  Top 1.27: N2.C 94.98,50.28 92.84,48.39 92.84,38.86 91.31,37.34
  Bottom 0.406: 72.64,14.86 72.77,14.73 72.77,14.12 U3.8 72.77,14.42 72.77,14.99 72.69,14.91 C11.1 70.43,14.86 69.22,14.86 68.07,13.72 68.07,13.01 R21.2 67.44,13.07 67.44,13.72 67.06,14.1 v66.42,14.1 | 20.96,30.16 R39.2 20,29.53 C1.+ 19.81,25.27 21.34,25.27 26.16,20.45 27.23,20.45 C6.+ 28.01,20.45 28.7,20.45 29.46,19.68 29.46,17.02 30.86,15.62 33.27,15.62 34.66,17 C10.1 35.05,17.02 35.43,16.64 40.13,16.64 v41.02,17.78 41,17.8 U1.4 41,22.64 R10.2 | U4.8 58.04,14.46 58.04,14.99 57.93,14.87 C9.1 54.22,14.87 53.47,15.62 v53.47,16.51 | 19.96,13.59 C5.+ | C5.+ 19.85,13.3 | 7.11,25.53 6.99,25.65 6.99,39.91 7.49,40.42 7.49,42.8 C4.1 7.62,42.67 4.45,42.67 3.68,43.43 3.68,53.34 5.08,54.74 U2.8 | 20,13 C5.+
  Bottom 0.61: N1.2 N1.4 90.04,32.18 90.04,36.2 v91.19,37.34
  Bottom 1.676: N2.C 92.64,50.28 V6.C 92.58,56.39 91.06,57.91 4.7,57.91 1.91,55.12 1.91,25.22 V13.C 5.79,24.2 7.11,25.53 9.98,25.53 C3.+ C1.+ 19.43,24.98 19.43,24.64 17.02,22.29 17.02,16.13 19.85,13.3 | X4.-1 20,13
  other vias: 84.13,35.64 86.67,35.64 89.72,35.64 94.04,28.02 91.88,28.02 87.56,33.61 82.99,37.42 85.53,37.42 88.14,37.34 81.47,35.77 93.28,30.69 92.46,35.56
  pour Bottom: 79.38,38.99 100.08,38.99 100.08,26.92 90.93,26.92 90.93,29.34 87.88,29.34 87.88,30.23 84.07,34.04 79.38,34.04
  pour Top: 79.38,36.2 80.26,36.2 83.06,38.99 100.08,38.99 100.08,26.92 90.93,26.92 90.93,29.34 87.88,29.34 87.88,30.23 84.07,34.04 79.38,34.04
X6-OPAMP  (via drill 0.5)
  Top 0.406: v38.48,17.78 38.48,18.92 39.62,20.07 v52.62,20.07 61.38,20.07 v63.63,17.91
  Bottom 0.406: U4.1 | U1.2 38.46,17.8 v38.48,17.78 | v52.62,20.07 56.64,20.07 57.02,19.68 58.01,19.68 U4.1 | R50.2 57.57,21.55 58.04,21.08 58.04,19.66 U4.1 | U4.5 62.91,14.4 63.63,15.11 v63.63,17.91

## Text on the board
Top: b-redemann.de | + | PocketPowerSource / Version 4.3
Bottom: b-redemann.de | + | PocketPowerSource
Document: +3,3V | GND | MISO | MOSI | SCK | RESET | CC | Spannung | Strom | On/off | PWR | OUT + | Abgleich I | Abgleich U | Set-I | Powerbuchse / (19V DC) | OUT -
tTestmark: +3V3 | GND | MISO | MOSI | SCK | RESET | ISP Connector